# Altium PCB G431.PcbDoc
Units mil, origin at the board's own origin, x right, y up, seen from the top; angles counter-clockwise.
Board outline 1188.98 x 944.88 mil, 2 copper layers (Top Layer, Bottom Layer); 43 components, 38 nets, 161 pads, 46 vias.
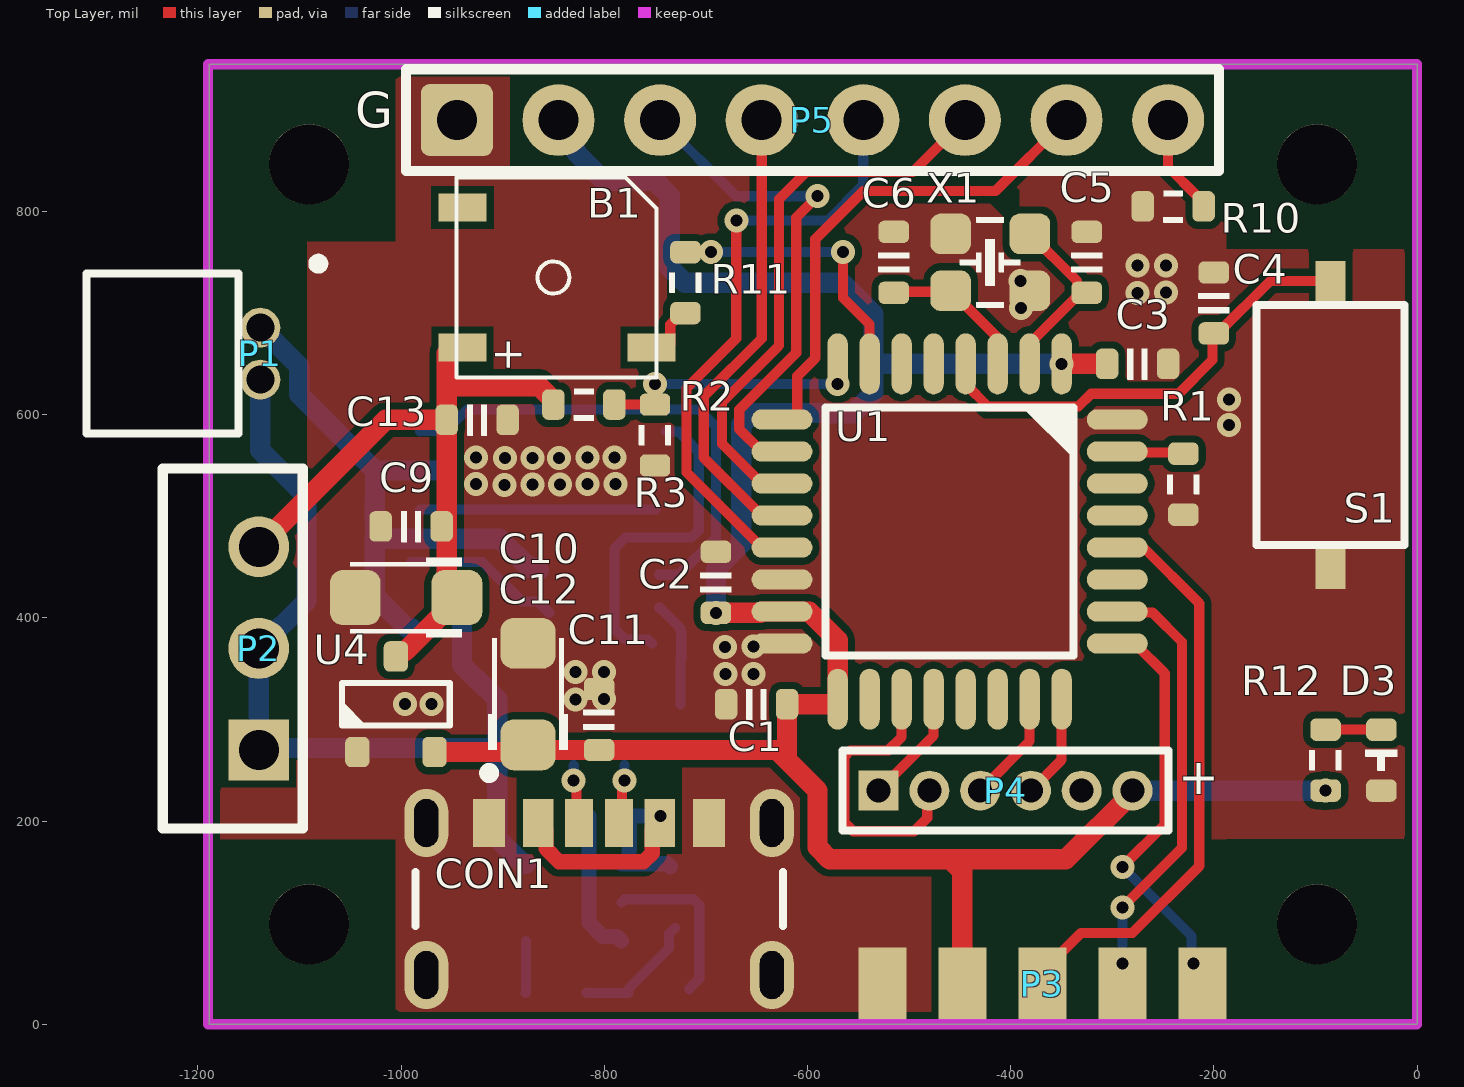
[diagram p0: Top Layer view]
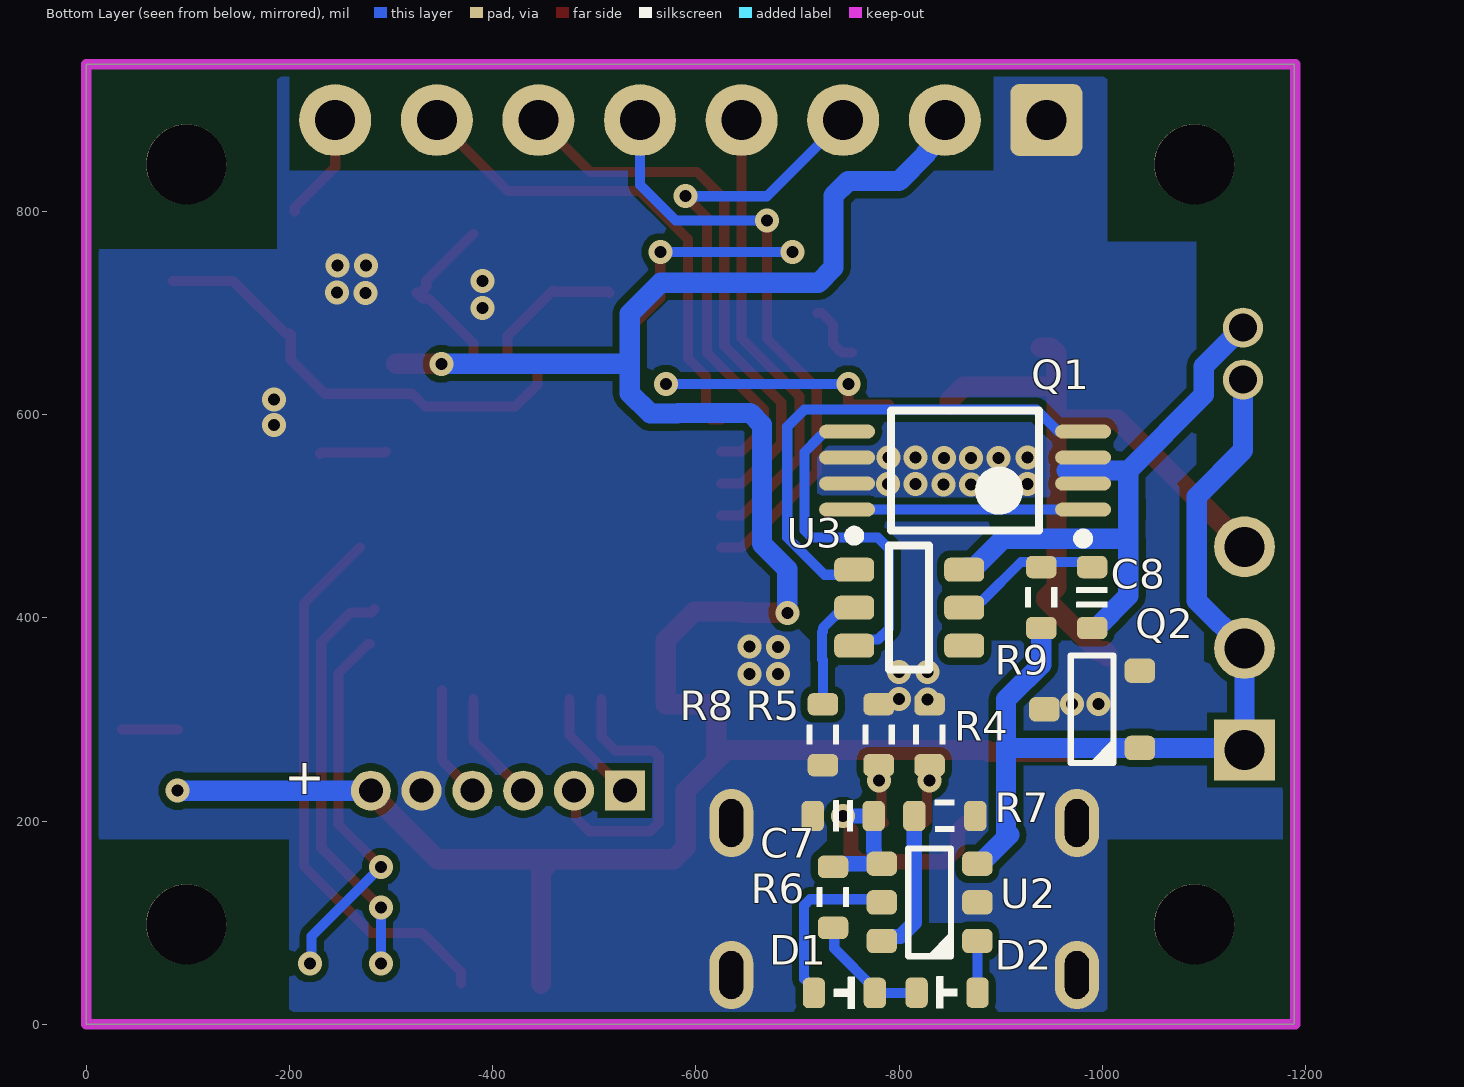
[diagram p1: Bottom Layer view, seen from below]

## Layer stack, top to bottom
Top Solder: solder mask 0.4, Solder Resist, Dk 3.5
Top Layer: signal copper 1.4
Dielectric 1: dielectric 12.6, FR-4, Dk 4.8
Bottom Layer: signal copper 1.4
Bottom Solder: solder mask 0.4, Solder Resist, Dk 3.5

## Board outline
-1188.98,0 0,0 0,944.88 -1188.98,944.88

## Design rules (kind name [scope] priority, off if disabled: settings)
Clearance [All] p1: gap=7 ignorepadtopadclearanceinfootprint=FALSE except(0: Arc-Hole Track-Hole SMDPad-Hole THPad-Hole Via-Hole Fill-Hole Poly-Hole Region-Hole Text-Hole)
PlaneConnect [All] p1: planeconnectstyle=Direct reliefexpansion=20 reliefentries=4 reliefconductorwidth=10 reliefairgap=10
PolygonConnect [All] p1: connectstyle=Direct reliefconductorwidth=10 reliefentries=4 polygonreliefangle="90 Angle" airgapwidth=10
RoutingVias [All] p1: holewidth=28 width=50 viastyle="Through Hole" minholewidth=28 minwidth=50 maxholewidth=28 maxwidth=50
SolderMaskExpansion [All] p1: expansion=4 istentingtop=FALSE
Width [All] p1: maxlimit=60 minlimit=7 preferedwidth=15 minimp=50.000000 maximp=50.000000 favimp=50.000000
29 further rules are at their usual default settings.

## Components (designator, comment, footprint, x,y, rotation, side; value= is the part's Value field where it differs from the comment)
B1 "BUZZER" "BUZZER - 5020" -850,735 r270 top
C1 "C0603" CAP_0603 -650,315 r0 top value=100nF
C2 "C0603" CAP_0603 -690,435 r270 top value=100nF
C3 "C0603" CAP_0603 -275,650 r180 top value=100nF
C4 "C0603" CAP_0603 -200,710 r90 top value=100nF
C5 "C0603" CAP_0603 -325,750 r270 top value=20pF
C6 "C0603" CAP_0603 -515,750 r270 top value=20pF
C7 "C0603" CAP_0603 -745,205 r0 bottom value=1uF
C8 "C0603" CAP_0603 -990,420 r90 bottom value=100nF
C9 "C0603" CAP_0603 -990,490 r180 top value=1uF
C10 "C1206" CAP_TAN_CASE_A_BK -995,420 r180 top value=10uF
C11 "C0603" CAP_0603 -805,300 r90 top value=1uF
C12 "C1206" CAP_TAN_CASE_A_BK -875,325 r90 top value=10uF
C13 "C0603" CAP_0603 -925,595 r0 top value=10uF
CON1 "USB_TypeC_6P" USB_TYPEC_6P -805,80 r0 top
D1 "D0603" LED_0603_RED -746.2,30.8 r0 bottom
D2 "D0603" LED_0603_RED -847.25,31.1 r180 bottom
D3 "D0603" LED_0603_RED -35,260 r270 top
P1 "JM24125-2P 1.25" JM24125-2 -1170,660 r270 top
P2 "Switch_3P." SWITCH_3PIN_90 -1140,370 r90 top
P3 "Microphone Header" "ICS-43432 Pin" -368.74,40 r180 top
P4 "J-Link Header" "Pin Header 1.27mm 1x6" -405,230 r0 top
P5 "LCD Header" "Pin Header 2.54mm 1X8" -595,890 r0 top
Q1 "FS8205" TSSOP8-1 -865,545 r0 bottom
Q2 "SI2302CDS_T1_GE3" SOT23-3 -990,310 r0 bottom
R1 "R0603" RES_0603 -229.91,531.61 r270 top value=10K
R2 "R0603" RES_0603 -820,610 r180 top value=?K
R3 "R0603" RES_0603 -750,580 r90 top value=?K
R4 "R0603" RES_0603 -830,285 r270 bottom value=5.1K
R5 "R0603" RES_0603 -780,285 r270 bottom value=5.1K
R6 "R0603" RES_0603 -735,125 r90 bottom value=1K
R7 "R0603" RES_0603 -845,205 r180 bottom value=2K
R8 "R0603" RES_0603 -725,285 r270 bottom value=1K
R9 "R0603" RES_0603 -940,420 r270 bottom value=100
R10 "R0603" RES_0603 -240,805 r180 top value=10K
R11 "R0603" RES_0603 -720,730 r90 top value=100
R12 "R0603" RES_0603 -90,260 r90 top value=1K
S1 "BUTTON" "BUTTON - SMD" -85,590 r90 top
U1 "STM32G431K6Tx" LQFP_P0.8_32 -460,485 r270 top
U2 "TP4057" SOT23-6 -830,120 r0 bottom
U3 "DW01A" SOT23-6-1 -810,410 r180 bottom
U4 "SC662K-3.3V" SOT23-3 -1005,315 r90 top
X1 "XTAL2520" XT_2520_4 -420,750 r0 top value=16MHz

## Footprints (in the part's own frame and the unit in brackets; to place one, negate y for a bottom-side part, rotate by r counter-clockwise, add the part's x,y. Pads: shape width x height; smd on the part's side, far side on the other; paste and mask are expansions set on the pad)
"BUTTON - SMD" [mm]
  rect 1x0.75 smd: 1(3.6,0) 2(-3.6,0)
  silkscreen extent -3,-1.85 3,1.85, body extent -3.89,-1.79 3.89,1.79, height 2.54
"BUZZER - 5020" [mm]
  rect 0.7x1.2 smd: 0(-1.75,-2.275) 1(1.75,-2.275) 2(1.75,2.45)
  silkscreen extent -2.5,-2.42 2.5,2.58, body extent -2.5,-2.43 2.5,2.58, height 2
CAP_0603 [mil] "Capacitance SMD 0603"
  rrect50% 22x30 smd: 1(-30,0) 2(30,0)
  silkscreen extent -10,-15 10,15, body extent -31,-16 32,16, height 24
CAP_TAN_CASE_A_BK [mil]
  rrect50% 50x54 smd: 1(-50,0) 2(50,0)
  silkscreen extent -55,-39 55,39, body extent -67,-35 67,35, height 71
"ICS-43432 Pin" [mm]
  rect 1.2x1.8 smd mask+0: 1(4,0) 2(2,0) 3(0,0) 4(-2,0) 5(-4,-0.006)
JM24125-2 [mm] "1.25mm 2P 90°"
  round 1 hole 0.7: 1(-0.65,0.8) 2(0.65,0.8)
  silkscreen extent -2.37,-3.55 2,2.38, body extent -3.83,-3.6 3.83,1.1, height 3.7
LED_0603_RED [mil]
  rrect50% 22x30 smd: 1(-30,0) 2(30,0)
  silkscreen extent -10,-16 10,16, body extent -32,-16 32,16, height 24
LQFP_P0.8_32 [mil]
  oval 60x20 smd: 1(-165,110.24) 2(-165,78.74) 3(-165,47.24) 4(-165,15.75) 5(-165,-15.75) 6(-165,-47.24) 7(-165,-78.74) 8(-165,-110.24) 17(165,-110.24) 18(165,-78.74) 19(165,-47.24) 20(165,-15.75) 21(165,15.75) 22(165,47.24) 23(165,78.74) 24(165,110.24)
  oval 20x60 smd: 9(-110.24,-165) 10(-78.74,-165) 11(-47.24,-165) 12(-15.75,-165) 13(15.75,-165) 14(47.24,-165) 15(78.74,-165) 16(110.24,-165) 25(110.24,165) 26(78.74,165) 27(47.24,165) 28(15.75,165) 29(-15.75,165) 30(-47.24,165) 31(-78.74,165) 32(-110.24,165)
  silkscreen extent -122,-122 122,122, body extent -178,-178 178,178, height 63
"Pin Header 1.27mm 1x6" [mm] "Pin Header 1x6 1.27mm"
  rect 1x1 hole 0.6: 1(-3.175,0)
  round 1 hole 0.6: 2(-1.905,0) 3(-0.635,0) 4(0.635,0) 5(1.905,0) 6(3.175,0)
  silkscreen extent -4.08,-1 4.08,1, body extent -3.81,-1.2 3.81,1.2, height 4.88
"Pin Header 2.54mm 1X8" [mm] "Pin Header 1x8 2.54mm"
  rrect25% 1.8x1.8 hole 1: 1(-8.89,0)
  round 1.8 hole 1: 2(-6.35,0) 3(-3.81,0) 4(-1.27,0) 5(1.27,0) 6(3.81,0) 7(6.35,0) 8(8.89,0)
  silkscreen extent -10.16,-1.27 10.16,1.27, body extent -10.16,-1.27 10.16,1.27, height 9.5
RES_0603 [mil]
  rrect50% 22x30 smd: 1(-30,0) 2(30,0)
  silkscreen extent -10,-16 10,16, body extent -31,-16 32,16, height 18
SOT23-3 [mil]
  rrect50% 30x24 smd: 1(-47,38) 2(-47,-38) 3(47,0)
  silkscreen extent -21,-53 21,53, body extent -55,-57 55,57, height 51
SOT23-6 [mil]
  rrect50% 30x24 smd: 1(-47,38) 2(-47,0) 3(-47,-38) 4(47,-38) 5(47,0) 6(47,38)
  silkscreen extent -21,-53 21,53, body extent -55,-57 55,57, height 57
SOT23-6-1 [mm] "SOT23, 6-Leads, Body 2.90x2.80mm, Pitch 0.95mm, IPC Medium Density"
  rrect50% 1x0.6 smd: 1(-1.375,0.95) 2(-1.375,0) 3(-1.375,-0.95) 4(1.375,-0.95) 5(1.375,0) 6(1.375,0.95)
  silkscreen extent -1.5,-1.55 0.5,1.92, body extent -0.88,-1.52 0.87,1.53, height 1.45
SWITCH_3PIN_90 [mil]
  rect 60x60 hole 39.37: 1(-100,0)
  round 60 hole 39.37: 2(0,0) 3(100,0)
  silkscreen extent -177,-43 177,94, body extent -177,-44 177,212, height 134
TSSOP8-1 [mm] "TSOP, 8-Leads, Body 2.93x4.40mm, Pitch 0.65mm, IPC Medium Density"
  oval 1.4x0.35 smd: 1(-2.95,0.975) 2(-2.95,0.325) 3(-2.95,-0.325) 4(-2.95,-0.975) 5(2.95,-0.975) 6(2.95,-0.325) 7(2.95,0.325) 8(2.95,0.975)
  silkscreen extent -3.07,-1.5 1.85,1.82, body extent -3.12,-1.5 3.16,1.5, height 1.2
USB_TYPEC_6P [mm]
  rect 0.7x1.2 smd paste+0 mask+0: A5(-0.5,3) B5(0.5,3)
  rect 0.76x1.2 smd paste+0 mask+0: A9(1.52,3) B9(-1.52,3)
  rect 0.8x1.2 smd paste+0 mask+0: A12(2.75,3) B12(-2.75,3)
  rrect100% 1.1x1.7 hole 1.2 slot 0.6 at 0 deg paste-1000 mask+0: A12(4.32,-0.8) A12(4.32,3) B12(-4.32,-0.8) B12(-4.32,3)
  silkscreen extent -4.59,0.43 4.59,4.37, body extent -4.97,-3.57 4.97,3.95, height 0.25
XT_2520_4 [mil]
  rrect50% 40x40 smd: 1(39,28) 2(-39,28) 3(-39,-28) 4(39,-28)
  silkscreen extent -30,-44 30,44, body extent -49,-39 49,39, height 31

## Part data
C1 C2 C3 C4 C5 C6 C7 C8 C9 C11 C13: library part Cap_0603, "Capacitor", Specification="X7R 50V", Type=0603
C10 C12: library part Cap_Tan_1206, "Capacitor Tantalum", Specification="X5R 10V", Type=1206
D1 D2 D3: library part LED_0603, "LED", Type=0603
P1: "SMT 2P 1.25mm"
P3: library part "ICS-43432 Pin"
P4: library part "Header 6", "Header"
P5: library part "Header 8", "Header"
R1 R2 R3 R4 R5 R6 R7 R8 R9 R10 R11 R12: library part Res_0603, "Resistor", Specification=±1%, Type=0603
U1: "MCU Mainstream Arm Cortex-M4 MCU 170 MHz 32 Kbytes of Flash Math Accel, Medium Analo"
U2: "Battery Charging IC 500 mA"
U4: "LDO 300mA"
X1: library part XTAL_2520_4P, "Crystal Oscillator", Type=XTAL2520_4P
B1: ComponentLink1Description="buy 5020", ComponentLink1URL=https://item.taobao.com/item.htm?spm=a230r.1.14.16.1e3f6dc2uNnnc9&id=556098727646, ComponentLink2Description="datasheet - 5020", ComponentLink2URL=https://img.alicdn.com/imgextra/i3/2658592015/TB27gU.bfAPyuJjy0FcXXbCzpXa_!!2658592015.jpg

## Free pads (board coordinates)
  round 78.74 hole 78.74: 1(-1090.55,98.43) 1(-1090.55,846.46) 1(-98.43,98.43) 1(-98.43,846.46)

## Via types
v1: diameter 23.62, hole 11.81, Top Layer to Bottom Layer, tented both sides, 46 vias

## Nets (pads, with @x,y where several pads share a name; then routed paths per layer and width w, separated by ;. In a path a pad name is that pad's centre, name@x,y a point inside that pad or via, vN(x,y) a via of type N, cw(c..) or ccw(c..) an arc to the next point about the centre after c; other vN are vias at no path point)
3.3V: C1.2 C2.2 C3.2 C11.1 C12.1 P3.2 P4.6 P5.2 R12.1 U1.1 U1.15 U1.17 U4.2 | length 2497.5
  Top Layer w20: U4.2 -888,268 -886,270 C11.1 -630,270 -620,260 ; v1(-690,405) -646.26,405 -645,406.26 U1.15 -598.31,406.26 -570.24,378.18 U1.17 -570.24,315 C1.2 -620,260 ; P3.2 -447.48,150.76 -459.2,162.48 ; v1(-349.76,650) C3.2 ; P4.6 -280,228.12 -345.64,162.48 -459.2,162.48 ; -620,260 -590,230 -590,174.2 -578.28,162.48 -459.2,162.48
  Bottom Layer w20: P5.2 -845,876.24 -826.23,857.47 -826.23,856.23 -800,830 -750,830 -735.37,815.37 -735.37,744.63 -720.74,730 -565.47,730 -535,699.53 -535,650 ; v1(-690,405) -690,447.93 -665,472.93 -665,590 -653.28,601.72 -582.46,601.72 -581.93,601.19 -555,601.19 -535,621.19 -535,650 ; v1(-349.76,650) -535,650 ; P4.6 v1(-90,230)
"Battery ADC": R2.1 R3.2 U1.8 | length 239.8
  Top Layer w10: R2.1 R3.2 v1(-750,630)
  Bottom Layer w10: v1(-750,630) -749.81,630.19 -570.56,630.19 v1(-570.37,630.37)
BOOT0: R1.1 U1.31 | length 66
  Top Layer w10: U1.31 -293.93,562.67 -230.98,562.67 R1.1
Butter: R11.2 U1.7 | length 250.9
  Top Layer w10: v1(-565,760) -565,715 -538.74,688.74 U1.7
  Bottom Layer w10: v1(-695,760) v1(-565,760)
GND: C1.1 C2.1 C3.1 C4.2 C5.1 C6.1 C7.2 C9.2 C10.2 C11.2 C12.2 C13.2 CON1.A12 CON1.B12 D3.2 P3.1 P4.5 P5.1 Q1.6 Q1.7 Q2.2 Q2.3 R1.2 R3.1 R4.1 R5.1 R7.2 R8.2 R10.2 S1.2 U1.14 U1.16 U1.32 U2.2 U4.1 X1.2 X1.4
  other v1: -996.11,315 -970,315 -828.01,319.79 -800,320 -680.85,344.68 -652.84,344.89 -828.09,346.52 -800.08,346.73 -680.93,371.41 -652.92,371.62 -898.21,530.6 -870.81,531.08 -843.65,531.29 -926.19,531.59 -816.28,531.75 -789.12,531.96 -897.77,557.4 -870.81,557.19 -844.28,557.4 -926.19,558.02 -816.28,557.87 -789.75,558.08 -185,590 -185,615 -390,705 -275,720 -246.99,720.21 -390.08,731.73 -275.08,746.73 -247.07,746.94
I2S_CK: P3.4 U1.26 | length 406.2
  Top Layer w10: v1(-290,115) -231.31,173.69 -231.31,376.32 -260.45,405.45 -280.45,405.45 U1.26@-283.55,408.55
  Bottom Layer w10: v1(-290,60) v1(-290,115)
I2S_SD: P3.3 U1.28 | length 545.6
  Top Layer w10: P3.3 -368.74,51.81 -330.55,90 -280,90 -214.31,155.69 -214.31,414.32 U1.28@-269.25,469.25
I2S_WS: P3.5 U1.25 | length 374.4
  Top Layer w10: v1(-290,155) -248.31,196.69 -248.31,345.37 -277.1,374.16 U1.25@-279.16,374.16
  Bottom Layer w10: v1(-290,155) -221.81,86.81 -221.81,61.81 v1(-220,60)
LCD_CS: P5.7 U1.9 | length 493
  Top Layer w10: U1.9 -614.62,595.24 -610,599.86 -610,637.88 -592.24,655.64 -592.24,772.76 -545,820 -415,820 P5.7
LCD_DC: P5.6 U1.11 | length 554.4
  Top Layer w10: U1.11 -645,532.24 -684,571.24 -684,611.96 -628,667.96 -628,812 -601.19,838.81 -496.19,838.81 P5.6
LCD_RES: P5.5 U1.13 | length 596.1
  Top Layer w10: v1(-670,791.19) -670,675 -719,626 -719,543.25 -645,469.25 U1.13
  Bottom Layer w10: v1(-670,791.19) -580.14,791.19 -545,826.33 P5.5
NetB1_2: B1.2 R11.1 | length 60.7
  Top Layer w10: B1.2@-753.54,661.1 -743.7,661.1 -734.92,669.88 -734.92,688.81 -723.73,700 R11.1
NetC8_1: C8.1 P1.1 Q1.2 Q1.3 U3.6 | length 594.8
  Bottom Layer w20: P1.1 -1137.8,685.59 -1100,647.79 -1100,619.45 -1025.55,545 ; -1025.55,478 -1025.55,496.57 -1025.7,496.72 -1025.7,516.51 -1025.55,516.66 -1025.55,545 ; C8.1 -994,390 -1025.7,421.7 -1025.7,478 -1008.82,478 -902.61,478 -873.82,449.21 -865.94,449.21 U3.6 ; -965,545 -1025.55,545
NetC8_2: C8.2 R9.1 U3.5 | length 156.6
  Bottom Layer w10: C8.2@-990,455 -940,455 -920,455 -881.25,416.25 -865.39,416.25 U3.5@-854.13,405
NetCON1_A5: CON1.A5 R4.2 | length 59.1
  Top Layer w10: v1(-830,240) -827.39,237.39 -827.39,200.82 CON1.A5
  Bottom Layer w10: v1(-830,240) R4.2
NetCON1_B5: CON1.B5 R5.2 | length 59.1
  Top Layer w10: CON1.B5 -782.61,200.82 -782.61,237.39 v1(-780,240)
  Bottom Layer w10: v1(-780,240) R5.2
NetD1_1: D1.1 D2.1 R6.1 | length 120.1
  Bottom Layer w10: D2.1 -817.1,30.95 -776.34,30.95 D1.1 ; D1.1@-776.2,34.8 -736.14,74.86 -736.14,89.04 -735.96,89.04 R6.1@-730.35,94.65
NetD1_2: D1.2 U2.5 | length 166.8
  Bottom Layer w10: U2.5 -780,123 -712.36,123 -706.5,117.14 -706.5,44.77 -716.2,35.07 D1.2@-716.2,34.53
NetD2_2: D2.2 U2.1 | length 51
  Bottom Layer w10: D2.2 -877.12,31.23 -877.12,81.88 U2.1
NetD3_1: D3.1 R12.2 | length 55
  Top Layer w10: R12.2 D3.1
NetP5_8: P5.8 R10.1 | length 106.3
  Top Layer w10: P5.8 -245,843.73 -216.27,815 -205.19,803.92 R10.1@-205.19,800.19
NetQ1_1: Q1.1 Q1.8 | length 232.3
  Bottom Layer w10: Q1.1 Q1.8
NetQ1_4: Q1.4 U3.1 | length 487.3
  Bottom Layer w10: Q1.4 -980.42,584.11 -955.89,584.11 -935,605 -706.73,605 -690,588.27 -690,479.05 -726.65,442.4 U3.1@-745.87,442.4
NetQ1_5: Q1.5 U3.3 | length 329.3
  Bottom Layer w10: U3.3@-753.27,375 -756.84,378.57 -779.14,378.57 -790,389.43 -790,468.18 -779.14,479.04 -714.05,479.04 -707,486.09 -707,563.32 -720.36,576.69 -720.47,576.69 -727.17,583.39 Q1.5@-738.86,583.39
NetR7_1: R7.1 U2.6 | length 144.5
  Bottom Layer w15: R7.1 -815,100 -801.5,86.5 -787.5,86.5 U2.6
NetR8_1: R8.1 U3.2 | length 104.8
  Bottom Layer w10: U3.2@-745.87,410 -745,410 -725,390 -725,386.74 -724.18,385.92 -724.18,359.28 -725,358.46 R8.1
OSC_IN: C5.2 U1.2 X1.1 | length 180.4
  Top Layer w10: U1.2 -381.26,670 -336.95,714.31 -330.69,714.31 C5.2 -328.73,720 -334.69,725.96 -334.69,731.69 X1.1
OSC_OUT: C6.2 U1.3 X1.3 | length 148
  Top Layer w10: C6.2 -514,721 -460,721 X1.3 -414.67,677.67 -414.67,651.91 U1.3
RST: C4.1 S1.1 U1.4 | length 454.1
  Top Layer w10: U1.4 -444.25,630 -422.25,608 -333.35,608 -320.72,620.63 -234.63,620.63 -201.25,654 -201.25,678.75 C4.1 -196,680 -144.27,731.73 S1.1
SPI_MOSI: P5.4 U1.12 | length 456.5
  Top Layer w10: P5.4 -645,675 -702,618 -702,557.75 -645,500.75 U1.12
SPI_SCK: P5.3 U1.10 | length 498.3
  Top Layer w10: U1.10 -645,563.74 -667,585.74 -667,604.92 -611,660.92 -611,794 v1(-590,815)
  Bottom Layer w10: P5.3 -670,815 v1(-590,815)
SYS_SWCLK: P4.4 U1.24 | length 111.2
  Top Layer w10: P4.4 -350,260 U1.24@-350,328.74
SYS_SWDIO: P4.3 U1.23 | length 110.2
  Top Layer w10: P4.3 -381.26,278.74 U1.23
USART_Rx: P4.1 U1.20 | length 112.5
  Top Layer w10: P4.1 -475.75,284.25 U1.20
USART_Tx: P4.2 U1.19 | length 284.7
  Top Layer w10: U1.19 -507.24,282.76 -520.44,269.56 -557.52,269.56 -563.38,263.7 -563.38,198.38 -555,190 -495,190 -482.03,202.97 -482.03,227.97 P4.2
VBUS: C7.1 CON1.A9 CON1.B9 R6.2 U2.4 | length 295.4
  Top Layer w15: CON1.B9 -857.38,190.65 -857.38,172.9 -844.47,159.99 -761.4,159.99 -752.62,168.77 CON1.A9@-752.62,190.65
  Bottom Layer w15: v1(-744.81,205) C7.1 -775,171.29 -775.5,170.79 -775.5,162.5 -780,158 U2.4 -775,158 -738,158 R6.2
VCC: B1.1 C9.1 C10.1 C13.1 P2.3 R2.2 U4.3 | length 700.8
  Top Layer w20: P2.3 -1015,595 C13.1 ; U4.3 -1005,365 -1003,367 -996,367 -945,418 C10.1 -955,430 C13.1 ; B1.1 -949.41,666.1 -955,660.51 -955,627.76 ; R2.2 -850,614 -863.76,627.76 -955,627.76 ; C13.1 -955,627.76
VIN: P1.2 P2.1 P2.2 Q2.1 R9.2 U2.3 | length 900.3
  Bottom Layer w20: P2.1 P2.1@-1140,272 ; P1.2 -1138.5,564.84 -1093,519.33 -1093,417 P2.2 P2.1@-1140,272 ; R9.2 -940,354 -925.76,339.76 -925.24,339.76 -905.25,319.77 -905.25,272 ; U2.3 -880,158 -908.5,186.5 -905.25,189.75 -905.25,272 ; P2.1@-1140,272 Q2.1 -905.25,272
pads on no net: B1.0 U1.5 U1.6 U1.18 U1.21 U1.22 U1.27 U1.29 U1.30 U3.4

## Polygon pours and split planes (outlines as drawn)
GND on Bottom Layer "GND_L02_P001" (solid, pour order 1): -1190,0 -1190,944.88 0,944.88 0,0
GND on Top Layer "GND_L01_P000" (solid, pour order 0): -1190,0 -1190,944.88 0,944.88 0,0

## Keep-outs
Keep-Out Layer:
  lines w10: -1190,0 0,0 0,944.88 -1190,944.88 -1190,0

## Other copper
Top Layer:
  pour cut-out: -1180,770 -1092.5,770 -1092.5,547.5 -1090,545 -1130,505 -1180,505
  pour cut-out: -886.8,228.73 -886.8,243.2 -880,250 -872.25,242.25 -850.56,242.25 -850.56,229.28 -851.11,228.73
  pour cut-out: -478.1,181.96 -187.87,181.96 -187.87,7.13 -190,5 -197.24,12.24 -478.1,12.24
  pour cut-out: -723.2,228.73 -723.2,253.2 -740,270 -770,240 -770,225
  pour cut-out: -738.51,745.49 -738.51,663.64 -718.59,643.72 -687.24,675.07 -687.24,742.86
  pour cut-out: -425,810 -422.38,810 -407.01,794.63 -396.31,805.33 -391,805.33 -391,821 -400,830
  pour cut-out: -349.76,357.33 -341.81,357.33 -354.56,344.59 -354.56,238.14 -277.36,238.14 -260.55,254.95 -262.71,257.11 -262.71,359.77
  pour cut-out: -482.88,184.81 -457.89,209.81 -457.89,214.93 -354.93,214.93 -337.5,197.5 -352.82,182.18 -352.82,179.81
  pour cut-out: -1177.76,611.41 -1175.59,609.23 -1147.35,609.23 -1147.35,459.98 -1157.33,450 -1180,450
  pour cut-out: -1180,450 -1100,450 -1100,260 -1176.08,260 -1177.76,261.68
  pour cut-out: -187.87,930 -12.87,930 -12.87,763.03 -187.87,763.03
  pour cut-out: -187.87,181.97 -12.87,181.97 -12.87,15 -187.87,15
  pour cut-out: -1180,181.97 -1005,181.97 -1005,15 -1180,15
  pour cut-out: -1180,930 -1005,930 -1005,770 -1180,770
  pour cut-out: -826.26,258.81 -821.44,258.81 -811.25,269 -801.11,258.85 -801.11,228.73
  pour cut-out: -893.05,934.94 -893.05,840 -200,840 -200,850 -200,940
Bottom Layer:
  pour cut-out: -1180,770 -1092.5,770 -1092.5,547.5 -1090,545 -1130,505 -1180,505
  pour cut-out: -1134.75,582.49 -1130.82,586.42 -1127.82,586.42 -1072.74,531.34 -1075.67,528.42 -1075.67,516.22
  pour cut-out: -1175,510 -1100,510 -1100,357.89 -1100.87,357.02 -1103.85,360 -1175,360
  pour cut-out: -732.78,425.21 -720.11,437.88 -707.33,437.88 -707.33,399.78 -698.78,391.22 -715,375
  pour cut-out: -760.02,186.99 -752.66,194.34 -728.86,194.34 -728.86,180.52 -721.13,172.78 -760.22,172.78
  pour cut-out: -820.5,273.24 -789.5,273.24 -792.45,270.29 -792.45,218.49 -818.49,218.49 -820,220
  pour cut-out: -187.87,930 -12.87,930 -12.87,763.03 -187.87,763.03
  pour cut-out: -200,181.97 -12.87,181.97 -12.87,15 -200,15
  pour cut-out: -1180,181.97 -1005,181.97 -1005,15 -1180,15
  pour cut-out: -1180,930 -1005,930 -1005,770 -1180,770
  pour cut-out: -954.38,377.73 -979.53,377.73 -980.5,376.76 -1010,406.26 -1010,435 -940,435 -880.44,377.73
  pour cut-out: -893.05,934.94 -893.05,840 -200,840 -200,850 -200,940
  pour cut-out: -868,101.25 -866.75,100 -811.35,100 -769.82,58.48 -818.3,10 -865,10

## Silkscreen, mask and mechanical layers (free items; w line width, h text height)
Top Overlay:
  text "G" at -1045,870.72 h60
  text "+" at -235,214.45 h60
Bottom Overlay:
  text "+" at -235,214.45 h60
Bottom Component Center:
  text "+" at -210,214.45 h60

## Text inside footprints (layer, text, board x,y; h text height)
B1: Top Overlay "+" at -907.09,676.1 h30 r270